# EAGLE board CT_schematic (EAGLE 7.6.0)

Size 100 x 80 mm. Coordinates in mm from the lower left corner, seen from the top.
Outline: 0,0 100,0 100,80 0,80 0,0
Copper layers (1*16): Top 0.035mm / dielectric 1.5mm / Bottom 0.035mm
Design rules "default": minimum track width 10mil, minimum drill 24mil, track to track 8mil, track to pad 8mil, pad to pad 8mil, via to via 8mil, smd to smd 8mil, copper to edge 40mil, drill to drill 8mil, minimum pad ring 10mil, minimum via ring 8mil, stop-mask expansion 4mil, vias tented up to drill 0mil, thermal gap 10mil

## Footprints (pad centres in the part's own frame; a part is rotated, then mirrored left to right if it is on the bottom)
C0603 = smd 0.8 x 0.8: 1 -0.762,0; 2 0.762,0
C0402 = smd 0.5 x 0.5: 1 -0.508,0; 2 0.508,0
C0805 = smd 1.2 x 1.3: 1 -1.016,0; 2 1.016,0
C1206 = smd 1.3 x 1.6: 1 -1.524,0; 2 1.524,0
L0603 = smd 0.8 x 0.8: 1 -0.762,0; 2 0.762,0
DR1040 = smd 1.6 x 3.2: 1 -4.458,0; 2 4.458,0
R0603 = smd 0.8 x 0.8: 1 -0.762,0; 2 0.762,0
LQFP32 = smd 0.54 x 0.85: 1 -2.8,-4.275; 2 -2,-4.275; 3 -1.2,-4.275; 4 -0.4,-4.275; 5 0.4,-4.275; 6 1.19,-4.275; 7 1.99,-4.275; 8 2.79,-4.275; 17 2.8,4.275; 18 2,4.275; 19 1.2,4.275; 20 0.4,4.275; 21 -0.4,4.275; 22 -1.2,4.275; 23 -2,4.275; 24 -2.8,4.275 | smd 0.85 x 0.54: 9 4.275,-2.8; 10 4.275,-2; 11 4.275,-1.2; 12 4.275,-0.4; 13 4.275,0.4; 14 4.275,1.2; 15 4.275,2; 16 4.275,2.8; 25 -4.275,2.8; 26 -4.275,2; 27 -4.275,1.2; 28 -4.275,0.4; 29 -4.275,-0.4; 30 -4.275,-1.2; 31 -4.275,-2; 32 -4.275,-2.8
SAMTEC_FTSH-105-01-L-DV-K = smd 0.762 x 2.794: 1 -2.54,-2.032; 2 -2.54,2.032; 3 -1.27,-2.032; 4 -1.27,2.032; 5 0,-2.032; 6 0,2.032; 7 1.27,-2.032; 8 1.27,2.032; 9 2.54,-2.032; 10 2.54,2.032
M10382 = smd 1 x 1: 1 0,0; 2 -1.6,0; 3 -3.2,0; 4 -3.2,-2; 5 -3.2,-3.6; 6 -3.2,-5.2; 7 -3.2,-6.8; 8 -3.2,-8.4; 9 -3.2,-10; 10 -3.2,-11.6; 11 -3.2,-13.2; 12 -3.2,-14.8; 13 -3.2,-16.4; 14 -3.2,-18; 15 -3.2,-19.6; 16 -3.2,-21.2; 17 -3.2,-22.8; 18 -0.55,-22.8; 19 1.05,-22.8; 20 2.65,-22.8; 21 5.3,-22.8; 22 5.3,-21.2; 23 5.3,-19.6; 24 5.3,-18; 25 5.3,-16.4; 26 5.3,-14.8; 27 5.3,-13.2; 28 5.3,-11.6; 29 5.3,-10; 30 5.3,-8.4; 31 5.3,-6.8; 32 5.3,-5.2; 33 5.3,-3.6; 34 5.3,-2; 35 5.3,0; 36 3.7,0
ABS07-32.768KHZ-7-T = smd 1.1 x 2.4: 1 -2.5,0; 2 0,0
ASFL1 = smd 1.7 x 1.5: 1 -1.27,-1.1; 2 1.27,-1.1; 3 1.27,1.1; 4 -1.27,1.1
TSOT-23-5 = smd 1.3 x 0.62: 1 -1.31,0.95; 2 -1.31,0; 3 -1.31,-0.95; 4 1.31,-0.95; 5 1.31,0.95
DFN8_2X3MC = smd 0.813 x 0.305: 1 -1.398,0.75; 2 -1.398,0.25; 3 -1.398,-0.25; 4 -1.398,-0.75; 5 1.398,-0.75; 6 1.398,-0.25; 7 1.398,0.25; 8 1.398,0.75 | smd 1.753 x 1.549: 9 0,0
JST-2-SMD = smd 1 x 4.6: 1 -1,-3.7; 2 1,-3.7 | smd 1.6 x 3.4: NC1 -3.4,1.5; NC2 3.4,1.5
FCI_10118193-0001LF = smd 0.4 x 1.35: 1 -1.3,2.675; 2 -0.65,2.675; 3 0,2.675; 4 0.65,2.675; 5 1.3,2.675 | smd 1.6 x 1.4: 6 -3.2,2.45; 7 3.2,2.45 | smd 1.9 x 1.9: 8 -1.2,0; 9 1.2,0 | hole 0.5: -3.3,0; 3.3,0
SON-6 = smd 0.55 x 0.3: 1 -0.355,0.5 | smd 0.52 x 0.3: 2 -0.37,0; 3 -0.37,-0.5; 4 0.37,-0.5; 5 0.37,0; 6 0.37,0.5
SW_4-1437565-2 = smd 1.4 x 2.1: 1 -2.23,4.55; 2 -2.23,-4.55; 3 2.23,4.55; 4 2.23,-4.55
LGM67K-G1J2-24-Z = smd 0.8 x 1.4: A -2,0; C 0,0
NC7SZ125M5X = smd 1.3 x 0.7: 1 -1.3,0.95; 2 -1.3,0; 3 -1.3,-0.95; 4 1.3,-0.95; 5 1.3,0.95

## Placement (x,y rotation side)
C1  1e-07  [C0603]  -48.26,67.31 0 top  (outside the outline)
C2  1e-07  [C0603]  -52.07,67.31 0 top  (outside the outline)
C3  1e-07  [C0603]  -55.88,67.31 0 top  (outside the outline)
C4  1e-07  [C0603]  -59.69,67.31 0 top  (outside the outline)
C5  4.7e-06  [C0603]  -44.45,67.31 0 top  (outside the outline)
C6  1e-08  [C0603]  -63.5,67.31 0 top  (outside the outline)
C7  1e-06  [C0603]  -15.24,72.39 0 top  (outside the outline)
C8  1e-11  [C0402]  -62.23,72.39 0 top  (outside the outline)
C9  1e-11  [C0402]  -15.24,77.47 0 top  (outside the outline)
C10  1e-07  [C0402]  -19.05,77.47 0 top  (outside the outline)
C11  2.2e-11  [C0402]  -54.61,72.39 0 top  (outside the outline)
C12  2.2e-11  [C0402]  -58.42,72.39 0 top  (outside the outline)
C13  1e-08  [C0402]  -22.86,77.47 0 top  (outside the outline)
C14  1e-05  [C0805]  -21.59,60.96 0 top  (outside the outline)
C15  1e-05  [C0805]  -26.67,60.96 0 top  (outside the outline)
C16  1e-07  [C0402]  -26.67,77.47 0 top  (outside the outline)
C17  1e-05  [C1206]  -48.26,54.61 0 top  (outside the outline)
C18  1e-05  [C1206]  -54.61,54.61 0 top  (outside the outline)
C19  1e-08  [C0402]  -30.48,77.47 0 top  (outside the outline)
C20  1e-08  [C0402]  -34.29,77.47 0 top  (outside the outline)
F1  240.0  [L0603]  -19.05,72.39 0 top  (outside the outline)
I1  3.8e-06  [DR1040]  -54.61,31.75 0 top  (outside the outline)
R1  10000.0  [R0603]  -59.69,60.96 0 top  (outside the outline)
R2  1000.0  [R0603]  -22.86,72.39 0 top  (outside the outline)
R3  1600.5  [R0603]  -26.67,72.39 0 top  (outside the outline)
R4  4700.0  [R0603]  -30.48,72.39 0 top  (outside the outline)
R5  2200.0  [R0603]  -34.29,72.39 0 top  (outside the outline)
R6  2200.0  [R0603]  -38.1,72.39 0 top  (outside the outline)
R7  10000.0  [R0603]  -64.77,60.96 0 top  (outside the outline)
R8  10000.0  [R0603]  -15.24,67.31 0 top  (outside the outline)
R9  10000.0  [R0603]  -20.32,67.31 0 top  (outside the outline)
R10  10000.0  [R0603]  -25.4,67.31 0 top  (outside the outline)
R11  5.0  [R0603]  -41.91,72.39 0 top  (outside the outline)
R12  220000.0  [R0603]  -44.45,60.96 0 top  (outside the outline)
R13  1000000.0  [R0603]  -39.37,60.96 0 top  (outside the outline)
R14  10000.0  [R0603]  -30.48,67.31 0 top  (outside the outline)
R15  10000.0  [R0603]  -35.56,67.31 0 top  (outside the outline)
R16  9100.0  [R0603]  -45.72,72.39 0 top  (outside the outline)
R17  680000.0  [R0603]  -49.53,60.96 0 top  (outside the outline)
R18  120000.0  [R0603]  -54.61,60.96 0 top  (outside the outline)
R19  2000.0  [R0603]  -49.53,72.39 0 top  (outside the outline)
R20  10000.0  [R0603]  -40.64,67.31 0 top  (outside the outline)
U1  STM32L021K4T6  [LQFP32]  -24.13,33.02 0 top  (outside the outline)
U2  FTSH-105-01-L-DV-K  [SAMTEC_FTSH-105-01-L-DV-K]  -45.72,7.62 0 top  (outside the outline)
U3  M10382  [M10382]  -19.05,24.13 0 top  (outside the outline)
U4  ABS07-32.768KHZ-7-T  [ABS07-32.768KHZ-7-T]  -27.94,54.61 0 top  (outside the outline)
U5  ASFL1-12MHZ-NCS  [ASFL1]  -41.91,44.45 0 top  (outside the outline)
U6  ltc3406es5  [TSOT-23-5]  -31.75,59.69 0 top  (outside the outline)
U7  MCP73831T-2ACI/MC  [DFN8_2X3MC]  -43.18,76.2 0 top  (outside the outline)
U8  S2B-PH-SM4-TB(LF)(SN)  [JST-2-SMD]  -22.86,46.99 0 top  (outside the outline)
U9  10118193-0001LF  [FCI_10118193-0001LF]  -50.8,43.18 0 top  (outside the outline)
U10  TPS3895ADRYR  [SON-6]  -36.83,76.2 0 top  (outside the outline)
U11  4-1437565-2  [SW_4-1437565-2]  -44.45,31.75 0 top  (outside the outline)
U12  Q65110A2395  [LGM67K-G1J2-24-Z]  -36.83,54.61 0 top  (outside the outline)
U13  nc7sz125m5x  [NC7SZ125M5X]  -59.69,53.34 0 top  (outside the outline)
U14  nc7sz125m5x  [NC7SZ125M5X]  -15.24,60.96 0 top  (outside the outline)

## Library data of the parts
C1-C20 F1 I1 R1-R20 U1-U14 = circuit_tree

## Nets
CLK_CRYSTAL_U1_2: C8.1 U1.2 U4.1
CLK_CRYSTAL_U1_3: C9.1 U1.3 U4.2
CLK_U1_6: U1.6 U5.3
GND: C1.2 C2.2 C3.2 C4.2 C5.2 C6.2 C7.2 C8.2 C9.2 C10.2 C11.2 C12.2 C13.2 C14.2 C15.1 C15.2 C16.2 C17.2 C18.2 C19.2 C20.2 R2.2 R7.2 R11.2 R12.2 R16.2 R18.2 R19.2 U1.16 U1.32 U2.3 U2.5 U3.2 U3.4 U3.14 U3.17 U3.21 U3.24 U3.26 U3.28 U3.33 U3.34 U3.35 U3.36 U5.2 U6.2 U7.6 U7.9 U8.2 U9.5 U9.6 U9.7 U9.8 U9.9 U10.2 U12.C U13.2 U13.3 U14.1 U14.3
INPUT_USBPOWER_5V: C17.1 R20.2 U7.1 U7.2 U9.1
NET_U1_4: R4.1 U1.4 U14.4
NET_U1_5: C6.1 C7.1 F1.1 U1.5
NET_U1_10: R5.1 U1.10 U3.19
NET_U1_20: R6.1 U1.20 U3.18
NET_U1_30: R3.1 U1.30 U12.A
NET_U1_31: R1.1 R7.1 U1.31 U11.3 U11.4
NET_U2_9: R11.1 U2.9
NET_U6_1: U6.1
NET_U6_3: I1.1 U6.3
NET_U6_5: R12.1 R13.1 U6.5
NET_U6_ATNET_3: I1.2 R13.2
NET_U7_5: R20.1 U7.5
NET_U7_8: R19.1 U7.8
NET_U10_1: R15.1 R16.1 U10.1
NET_U10_3: R17.2 R18.1 U10.3
NET_U10_4: R14.1 U10.4 U13.4 U14.2
NET_U11_1: R2.1 U11.1 U11.2
PROC_SYS_SWCLK: R9.1 U1.24 U2.4
PROC_SYS_SWDIO: R10.1 U1.23 U2.2
RST_OUT_U2_JTAG_RST_B: R8.1 U2.10 U13.1
VCC_S1_3V7: C14.1 C18.1 U6.4 U7.3 U7.4 U8.1
VCC_TIER1_3V3: C1.1 C2.1 C3.1 C4.1 C5.1 C10.1 C11.1 C12.1 C13.1 C15.2 C16.1 C19.1 C20.1 F1.2 I1.2 R1.2 R3.2 R4.2 R5.2 R6.2 R8.2 R9.2 R10.2 R13.2 R14.2 R15.2 R17.1 U1.1 U1.17 U2.1 U3.5 U3.25 U3.27 U5.4 U10.6 U13.5 U14.5

## Tracks (layer width: path | path; a pad name or v marks a point on that pad's centre or on a via)
CLK_CRYSTAL_U1_2  (2 unrouted)
CLK_CRYSTAL_U1_3  (2 unrouted)
CLK_U1_6  (1 unrouted)
GND  (59 unrouted)
INPUT_USBPOWER_5V  (4 unrouted)
NET_U1_4  (2 unrouted)
NET_U1_5  (3 unrouted)
NET_U1_10  (2 unrouted)
NET_U1_20  (2 unrouted)
NET_U1_30  (2 unrouted)
NET_U1_31  (4 unrouted)
NET_U2_9  (1 unrouted)
NET_U6_3  (1 unrouted)
NET_U6_5  (2 unrouted)
NET_U6_ATNET_3  (1 unrouted)
NET_U7_5  (1 unrouted)
NET_U7_8  (1 unrouted)
NET_U10_1  (2 unrouted)
NET_U10_3  (2 unrouted)
NET_U10_4  (3 unrouted)
NET_U11_1  (2 unrouted)
PROC_SYS_SWCLK  (2 unrouted)
PROC_SYS_SWDIO  (2 unrouted)
RST_OUT_U2_JTAG_RST_B  (2 unrouted)
VCC_S1_3V7  (5 unrouted)
VCC_TIER1_3V3  (36 unrouted)